# Altium PCB lessbadschematic.PcbDoc
Units mm, origin at the board's own origin, x right, y up, seen from the top; angles counter-clockwise.
Board outline 152.4 x 101.6 mm, 2 copper layers (Top Layer, Bottom Layer); 18 components, 27 nets, 114 pads, 7 vias.
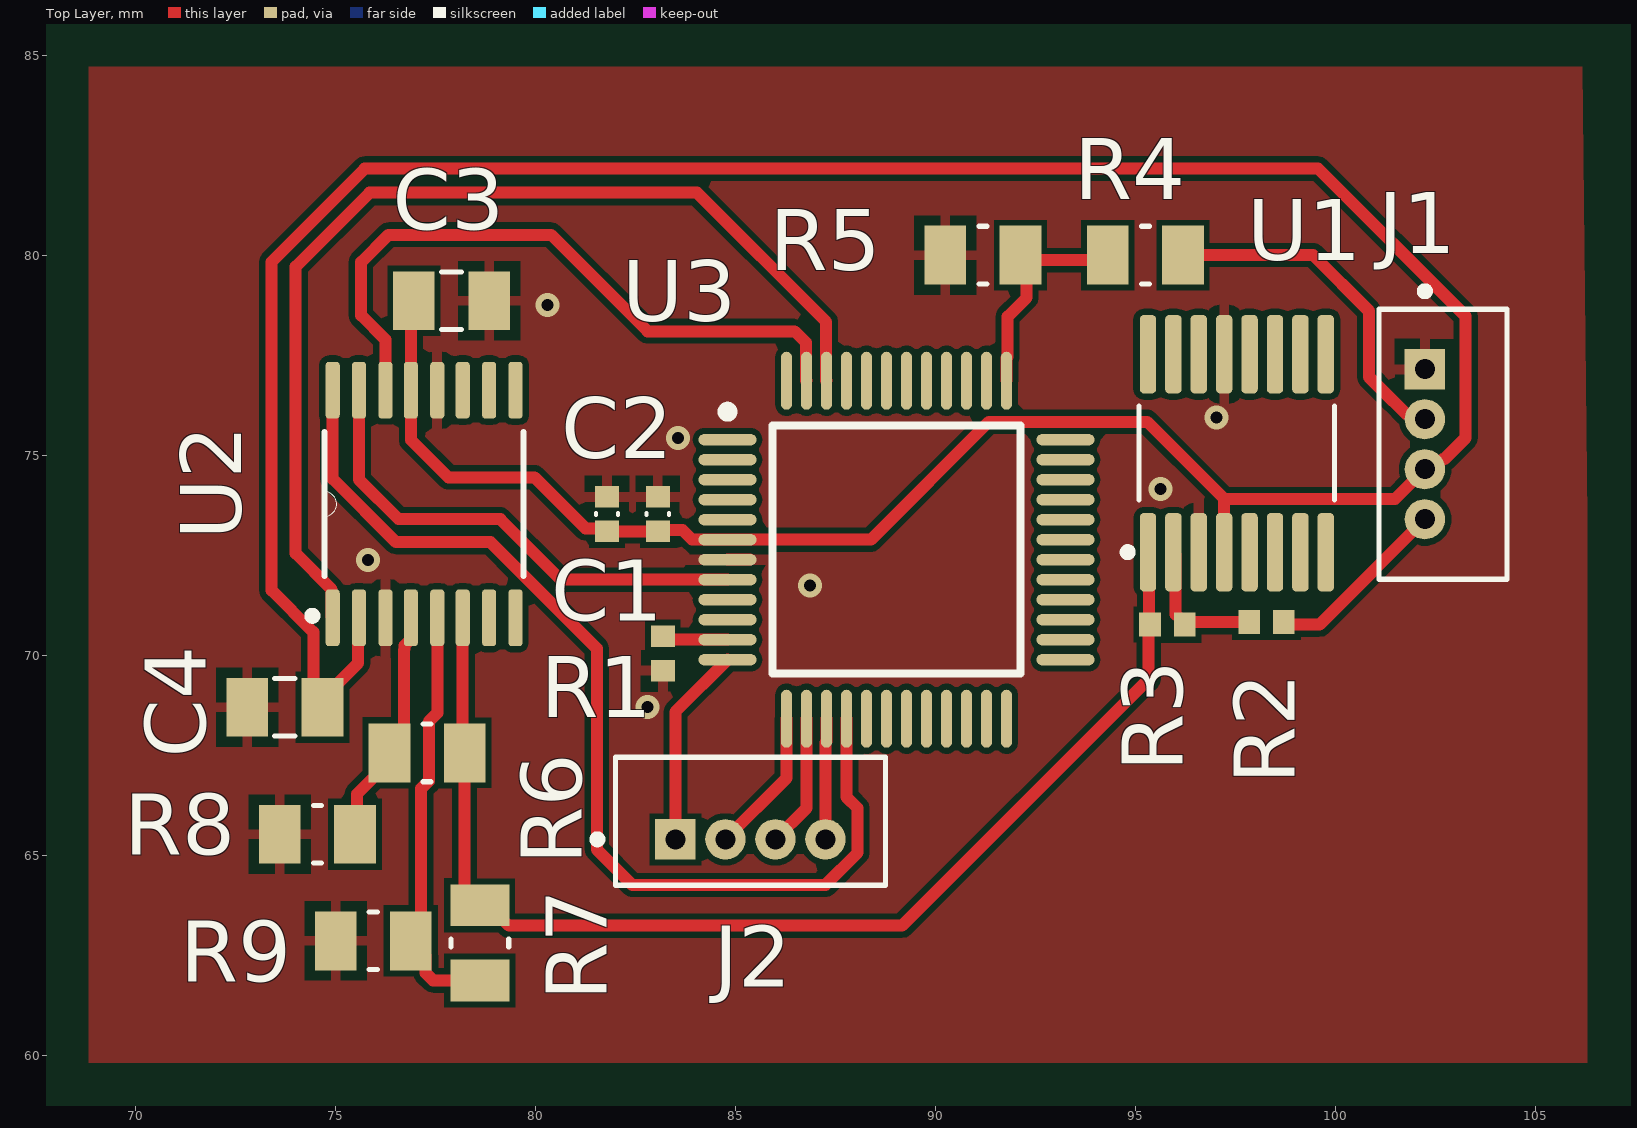
[diagram p0: Top Layer view]
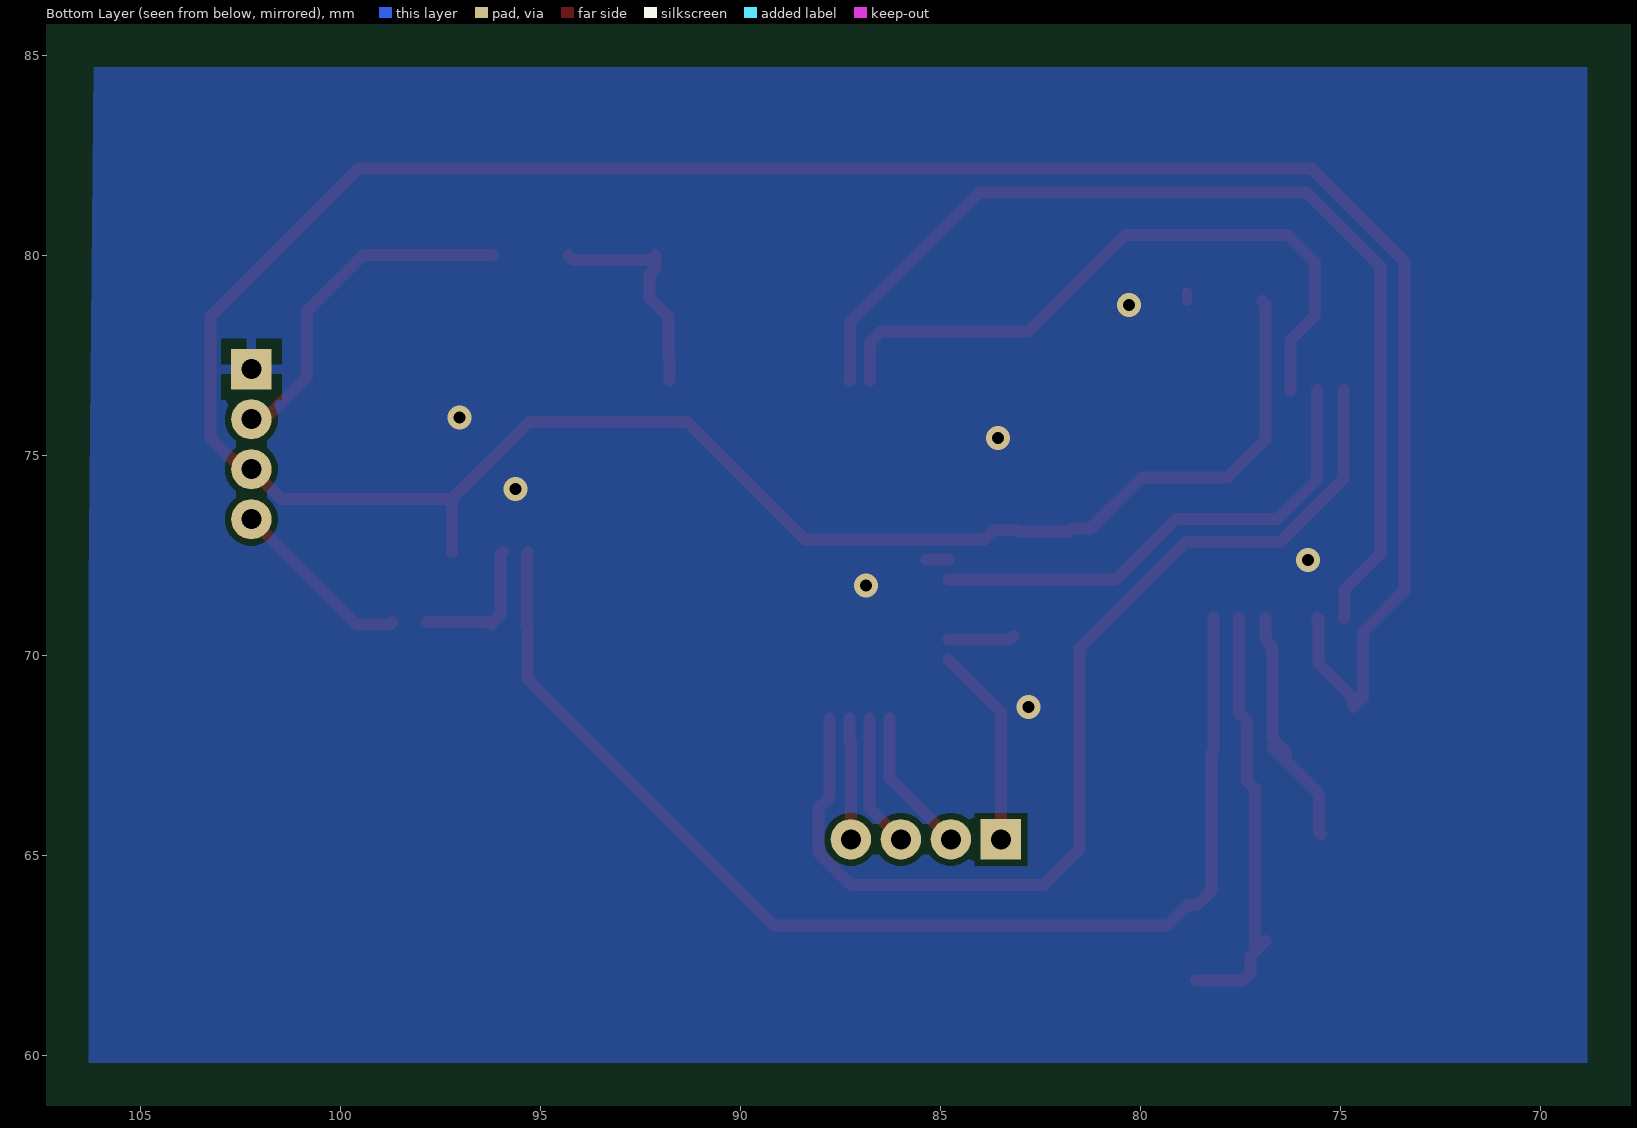
[diagram p1: Bottom Layer view, seen from below]
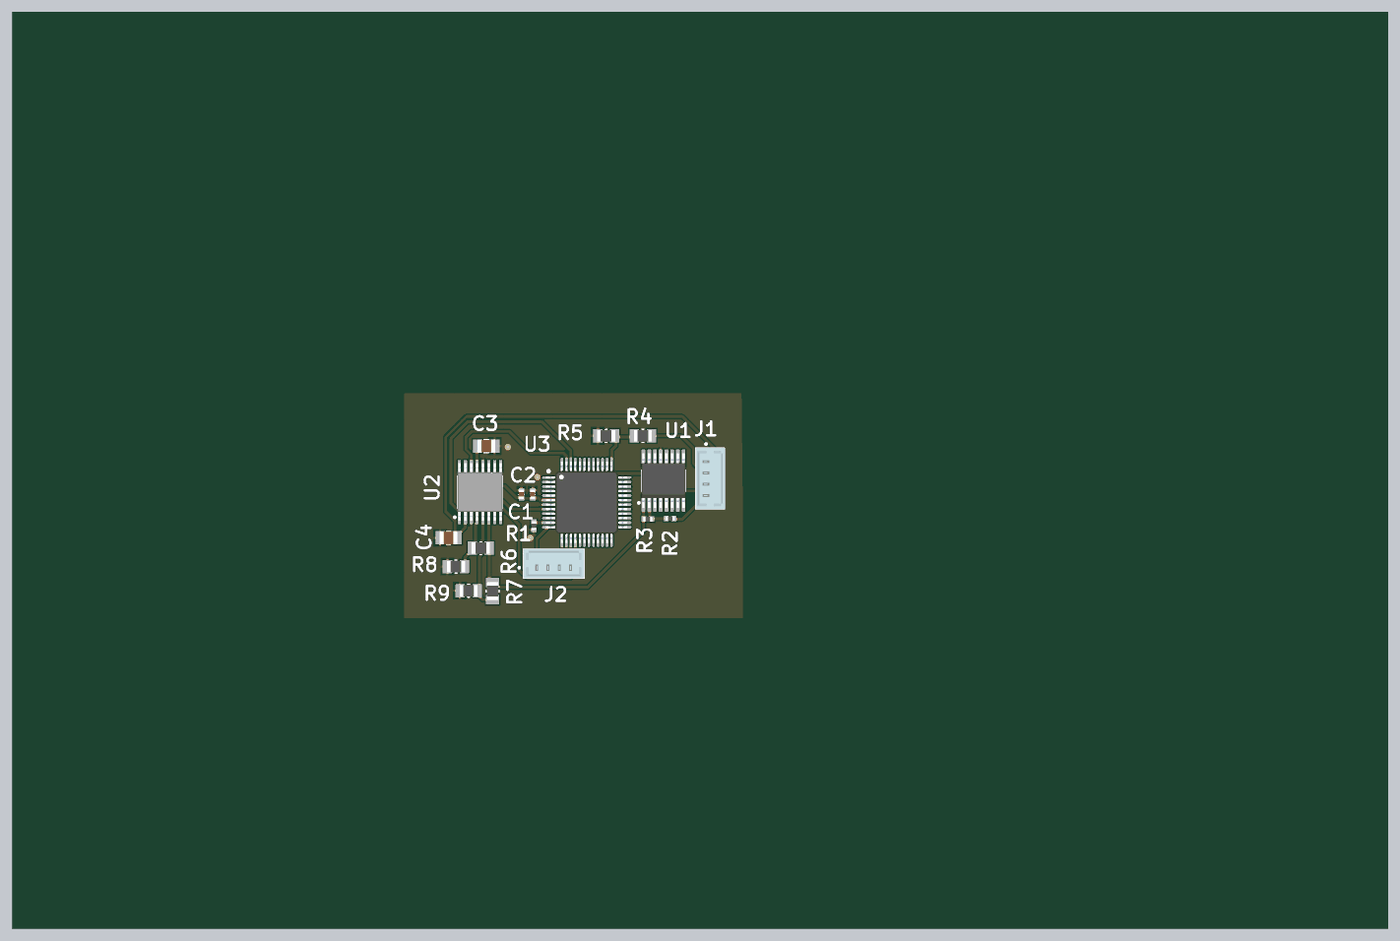
[diagram p2: 3D render of the assembled board from above, using the file's embedded part models]

## Layer stack, top to bottom
Top Solder: solder mask 0.0102, Solder Resist, Dk 3.5
Top Layer: signal copper 0.0356
Dielectric 1: dielectric 0.32, FR-4, Dk 4.8
Bottom Layer: signal copper 0.0356
Bottom Solder: solder mask 0.0102, Solder Resist, Dk 3.5

## Board outline
25.4,25.4 177.8,25.4 177.8,127 25.4,127

## Design rules (kind name [scope] priority, off if disabled: settings)
Clearance [All] p1: gap=0.152 ignorepadtopadclearanceinfootprint=FALSE
HoleSize [All] p1: absolutevalues=TRUE maxlimit=6.2 minlimit=0.3 maxpercent=80.000 minpercent=20.000
MinimumAnnularRing [All] p1: minimumring=0.15
MinimumSolderMaskSliver [All] p1: minsoldermaskwidth=0.1
PolygonConnect ViaConnect [IsVia] p1: connectstyle=Direct reliefconductorwidth=0.254 reliefentries=4 polygonreliefangle="90 Angle" airgapwidth=0.254
PolygonConnect [All] p2: connectstyle=Relief reliefconductorwidth=0.254 reliefentries=4 polygonreliefangle="90 Angle" airgapwidth=0.254
RoutingVias [All] p1: holewidth=0.3 width=0.6 viastyle="Through Hole" minholewidth=0.3 minwidth=0.5 maxholewidth=1 maxwidth=5
SilkToSilkClearance [All] p1: silktosilkclearance=0.1
SilkToSolderMaskClearance [IsPad] p1: minsilkscreentomaskgap=0.1 clearancetoexposedcopper=TRUE
SolderMaskExpansion [All] p1: expansion=0.051 istentingtop=FALSE
SupplyNets "Schematic Supply Nets_1" [InNet('GND')] p1: voltage=0.000
SupplyNets "Schematic Supply Nets" [InNet('3v3')] p2: voltage=0.000
Width [All] p1: maxlimit=25.4 minlimit=0.15 preferedwidth=0.3
26 further rules are at their usual default settings.

## Components (designator, comment, footprint, x,y, rotation, side; value= is the part's Value field where it differs from the comment)
C1 "100n" CAPACITOR_0402_1005M_55N 81.788,73.533 r270 top
C2 "10u" CAPACITOR_0402_1005M_55N 83.058,73.533 r270 top
C3 "100uF" CAPACITOR_0805_2012M-70N 77.902,78.867 r180 top
C4 "100uF" CAPACITOR_0805_2012M-70N 73.736,68.707 r180 top
J1 "0530470410" MOLEX_0530470410 102.235,77.156 r90 top
J2 "0530470410" MOLEX_0530470410 83.499,65.405 r180 top
R1 "5k" RESISTOR_0402_1005M_37N 83.185,70.053 r90 top
R2 "2k" RESISTOR_0402_1005M_37N 98.273,70.841 r180 top
R3 "3k" RESISTOR_0402_1005M_37N 95.796,70.777 r180 top
R4 "*" Resistor_0805_2012M-50N 95.25,80.01 r0 top
R5 "*" Resistor_0805_2012M-50N 91.186,80.01 r0 top
R6 "*" RESISTOR_0805_2012M-50N 77.292,67.564 r0 top
R7 "*" RESISTOR_0805_2012M-50N 78.613,62.814 r90 top
R8 "*" RESISTOR_0805_2012M-50N 74.549,65.532 r0 top
R9 "*" RESISTOR_0805_2012M-50N 75.946,62.865 r0 top
U1 "LT6222IGN#PBFA" SSOP-16N-3.9mmBody-1.75mm 97.536,75.057 r90 top
U2 "ADC128S052QCMT" TSSOP-16N_4.4mmBody-1.2mm 77.216,73.787 r90 top
U3 "MSP430FR2355TPT" LQFP_PT_48_N 89.027,72.644 r0 top

## Footprints (in the part's own frame and the unit in brackets; to place one, negate y for a bottom-side part, rotate by r counter-clockwise, add the part's x,y. Pads: shape width x height; smd on the part's side, far side on the other; paste and mask are expansions set on the pad)
CAPACITOR_0402_1005M_55N [mm] "Capacitor, 0402 (1005 metric), 0.55mm height, nominal pads"
  rect 0.54x0.6 smd mask+0.051: 1(-0.432,0) 2(0.432,0)
  silkscreen extent -0.03,-0.28 0.03,0.28, body extent -0.5,-0.28 0.5,0.27, height 0.48
CAPACITOR_0805_2012M-70N [mm] "Capacitor, 0805 (2012 metric), 0.7mm high, nominal pads,"
  rect 1.04x1.47 smd mask+0.051: 1(-0.94,0) 2(0.94,0)
  silkscreen extent -0.25,-0.72 0.25,0.72, body extent -1,-0.73 1,0.73, height 1.23
LQFP_PT_48_N [mm]
  oval 1.45x0.28 smd paste+0 mask+0.051: 1(-4.225,2.75) 2(-4.225,2.25) 3(-4.225,1.75) 4(-4.225,1.25) 5(-4.225,0.75) 6(-4.225,0.25) 7(-4.225,-0.25) 8(-4.225,-0.75) 9(-4.225,-1.25) 10(-4.225,-1.75) 11(-4.225,-2.25) 12(-4.225,-2.75) 25(4.225,-2.75) 26(4.225,-2.25) 27(4.225,-1.75) 28(4.225,-1.25) 29(4.225,-0.75) 30(4.225,-0.25) 31(4.225,0.25) 32(4.225,0.75) 33(4.225,1.25) 34(4.225,1.75) 35(4.225,2.25) 36(4.225,2.75)
  oval 0.28x1.45 smd paste+0 mask+0.051: 13(-2.75,-4.225) 14(-2.25,-4.225) 15(-1.75,-4.225) 16(-1.25,-4.225) 17(-0.75,-4.225) 18(-0.25,-4.225) 19(0.25,-4.225) 20(0.75,-4.225) 21(1.25,-4.225) 22(1.75,-4.225) 23(2.25,-4.225) 24(2.75,-4.225) 37(2.75,4.225) 38(2.25,4.225) 39(1.75,4.225) 40(1.25,4.225) 41(0.75,4.225) 42(0.25,4.225) 43(-0.25,4.225) 44(-0.75,4.225) 45(-1.25,4.225) 46(-1.75,4.225) 47(-2.25,4.225) 48(-2.75,4.225)
  silkscreen extent -4.35,-3.1 3.1,3.57, body extent -4.5,-4.5 4.5,4.5, height 1.6
MOLEX_0530470410 [mm]
  rect 1.008x1.008 hole 0.5 mask+0.051: 1(0,0)
  round 1.008 hole 0.5 mask+0.051: 2(-1.25,0) 3(-2.5,0) 4(-3.75,0)
  silkscreen extent -5.25,-2.05 2.05,1.15, body extent -5.25,-2.06 1.5,1.14, height 4.21
RESISTOR_0402_1005M_37N [mm] "Resistor, 0402 (1005 metric), 0.37mm height, nominal pads"
  rect 0.54x0.6 smd mask+0.051: 1(-0.432,0) 2(0.432,0)
  body extent -0.5,-0.25 0.5,0.25, height 0.37
Resistor_0805_2012M-50N [mm] "Resistor, 0805 (2012 metric), nominal pads"
  rect 1.04x1.47 smd mask+0.051: 1(-0.94,0) 2(0.94,0)
  silkscreen extent -0.1,-0.72 0.1,0.72, body extent -1,-0.63 1,0.62, height 0.5
RESISTOR_0805_2012M-50N [mm] "Resistor, 0805 (2012 metric), nominal pads"
  rect 1.04x1.47 smd mask+0.051: 1(-0.94,0) 2(0.94,0)
  silkscreen extent -0.1,-0.72 0.1,0.72, body extent -1,-0.63 1,0.62, height 0.5
SSOP-16N-3.9mmBody-1.75mm [mm] "SSOP, 16 pins, 3.9mm wide body, 1.75mm high"
  rrect50% 1.96x0.41 smd mask+0.051: 1(-2.475,2.222) 2(-2.475,1.587) 3(-2.475,0.952) 4(-2.475,0.317) 5(-2.475,-0.318) 6(-2.475,-0.953) 7(-2.475,-1.588) 8(-2.475,-2.222) 9(2.475,-2.222) 10(2.475,-1.587) 11(2.475,-0.952) 12(2.475,-0.317) 13(2.475,0.318) 14(2.475,0.953) 15(2.475,1.588) 16(2.475,2.222)
  silkscreen extent -2.57,-2.44 1.17,2.83, body extent -3,-2.44 3,2.44, height 1.75
TSSOP-16N_4.4mmBody-1.2mm [mil] "TSSOP, 0.65mm pitch, 4.4mm body, 1.2mm high, nominal pads"
  rrect50% 56x14 smd mask+2: 1(-112,90) 2(-112,64) 3(-112,38) 4(-112,13) 5(-112,-13) 6(-112,-38) 7(-112,-64) 8(-112,-90) 9(112,-90) 10(112,-64) 11(112,-38) 12(112,-13) 13(112,13) 14(112,38) 15(112,64) 16(112,90)
  silkscreen extent -114,-98 71,114, body extent -126,-98 126,98, height 46

## Part data
C1 C2: library part "GCM1555CxxxxxF Series", "Passive - Capacitor Series, 0402, C0G, 50V, ±1%, -55°C ~ 125°C, 0402 (1005 Metric)", Capacitance at Rated Voltage=100%, Package=0402, Rated Voltage=50V, Temp Range="-55°C ~ 125°C", Temperature Coefficient=C0G, Tolerance=±1%, Value Range="5pF ~ 1nF", E Series=E24, Supplier 1=Digikey
C3 C4: library part GRM21BR60J107ME15L, "Passive - Capacitor, 0805, 100uF Max, X5R, 6.3V ±20%, -55°C ~ 85°C, 0805 (2012 Metric). 20uF @ 6.3V", Capacitance at Rated Voltage=20%, Package=0805, Rated Voltage=6.3V, Supplier 1 Part No.=490-GRM155R61E225KE11JCT-ND, Temp Range="-55°C ~ 85°C", Temperature Coefficient=X5R, Tolerance=±20%, MF Part No.=GRM21BR60J107ME15L, Supplier 1=Digikey
J1 J2: "Header - Picoblade 04-pin, TH, STR", Supplier 1 Part No.=530470410, MF Part No.=0530470410, Mounting Type=Through-hole, Orientation=Straight, Pins=4, Pitch=1.25mm, Supplier 1=Digikey
R1 R2 R3: library part "RMCF0402JT Series", "Passive - Resistor Series, 0402, 5%, 1R - 20M, E24, 0.063W, 1/16W, ±100ppm/°C, -55°C ~ 155°C, 0402 (1005 Metric)", Package=0402, Power=1/16W, Rated Voltage=50V, Temp Range="-55°C ~ 155°C", Temperature Coefficient=±100ppm/°C, Tolerance=5%, Value Range="1 ~ 20M", E Series=E24, Supplier 1=Digikey
R4: library part "RMCF0805JT Series", "Passive - Resistor Series, 0805, 5%, 100m - 22M, E24, 0.063W, 1/16W, ±200ppm/°C, -55°C ~ 155°C, 0805 (2012 Metric)", MF Part No.=4k, Package=0805, Power=1/8W, Rated Voltage=150V, Temp Range="-55°C ~ 155°C", Temperature Coefficient=±200ppm/°C, Tolerance=5%, Value Range="100m ~ 22M", E Series=E24, Supplier 1=Digikey
R5: library part "RMCF0805JT Series", "Passive - Resistor Series, 0805, 5%, 100m - 22M, E24, 0.063W, 1/16W, ±200ppm/°C, -55°C ~ 155°C, 0805 (2012 Metric)", MF Part No.=8k, Package=0805, Power=1/8W, Rated Voltage=150V, Temp Range="-55°C ~ 155°C", Temperature Coefficient=±200ppm/°C, Tolerance=5%, Value Range="100m ~ 22M", E Series=E24, Supplier 1=Digikey
R6: library part "Generic Resistor", "Passive - Resistor, Generic", MF Part No.=10k, Tolerance=?%
R7 R8 R9: library part "Generic Resistor", "Passive - Resistor, Generic", MF Part No.=1k, Tolerance=?%
U1: library part LT6222IGN#PBF, "IC - Opamp, High Speed, 4-Channel, 60MHz GBWP, RRIO, 2.2V to 12.6V, -40 to 85, SSOP-16", Package=TSSOP-16, Rated Voltage=12.6V, Supplier 1 Part No.=LT6222IGN#PBF-ND, Temp Range="-40°C ~ 85°C", MF Part No.=LT6222IGN#PBF, Supplier 1=Digikey
U2: "IC - ADC, 8-Channel, 12-bit, SPI, Split digital/analog Vcc", MF Part No.=ADC128S052QCMT/NOPB-ND, Package=TSSOP-16, Rated Voltage=5.25V, Supplier 1 Part No.=ADC128S052CIMT/NOPB-ND, Temp Range="-40°C ~ 105°C", Supplier 1=Digikey
U3: "IC - Microcontroller, 24MHz, 32KB FRAM, Op-Amps/PGAs, 12-bit DACs, 12-bit ADC, 48-LQFP, -40 to 105C", Package=LQFP-48, Rated Voltage=3.6V, Supplier 1 Part No.=296-50260-ND, Temp Range="-40°C ~ 105°C", MF Part No.=MSP430FR2355TPT, Supplier 1=Digikey

## Via types
v1: diameter 0.6, hole 0.3, Top Layer to Bottom Layer, 7 vias

## Nets (pads, with @x,y where several pads share a name; then routed paths per layer and width w, separated by ;. In a path a pad name is that pad's centre, name@x,y a point inside that pad or via, vN(x,y) a via of type N, cw(c..) or ccw(c..) an arc to the next point about the centre after c; other vN are vias at no path point)
3v3: C1.2 C2.2 C3.2 C4.1 J1.3 U1.4 U2.2 U2.13 U3.6 | length 84.6
  Top Layer w0.3: U2.2 75.563,70.914 75.563,69.809 74.676,68.922 C4.1 74.45,68.933 74.45,70.584 73.406,71.628 73.406,79.843 75.732,82.169 99.568,82.169 103.251,78.486 103.251,75.438 102.727,74.914 102.684,74.914 102.427,74.656 J1.3 101.493,73.914 97.218,73.914 ; C3.2 76.886,78.791 76.886,75.393 77.824,74.455 79.977,74.455 81.256,73.176 81.713,73.176 C1.2 C2.2 83.091,73.134 83.681,73.134 83.911,72.904 84.792,72.904 U3.6 88.388,72.894 91.336,75.842 95.291,75.842 97.218,73.914 ; U1.4 97.218,73.914
"ADC C\S\": U2.1 U3.46 | length 26
  Top Layer w0.3: U2.1 74.902,70.97 74.902,71.656 74.004,72.554 74.004,79.719 75.854,81.569 84.039,81.569 87.267,78.341 87.267,76.879 U3.46
"ADC output": U2.15 U3.8 | length 12.5
  Top Layer w0.3: U2.15 75.59,74.397 76.581,73.406 79.121,73.406 80.633,71.894 U3.8
ADCA: R6.1 R8.2 U2.4 | length 6.3
  Top Layer w0.3: R8.2 75.544,65.587 75.544,66.541 R6.1@76.708,67.705 ; R6.1 76.708,67.92 76.708,70.135 76.731,70.158 76.731,70.254 76.886,70.409 U2.4
ADCB: R7.1 R9.2 U2.5 | length 10.9
  Top Layer w0.3: R9.2 R9.2@77.14,62.611 ; U2.5 77.546,68.561 77.338,68.353 77.338,66.868 77.14,66.669 R9.2@77.14,62.611 ; R7.1 77.445,61.874 77.256,62.063 77.256,62.495 R9.2@77.14,62.611
"Amplified signal": R3.2 R6.2 R7.2 U1.1 U2.6 | length 30.3
  Top Layer w0.3: U2.6 78.181,67.615 R6.2 ; R7.2@78.608,63.759 78.822,63.759 79.336,63.246 89.165,63.246 95.326,69.407 95.326,70.739 R3.2 95.339,70.802 95.339,72.557 U1.1 ; R7.2 78.602,63.754 78.232,64.124 R6.2@78.232,67.349 ; R6.2@78.232,67.349 R6.2 ; R6.2@78.232,67.349 R6.2
CLK: U2.16 U3.16 | length 26.3
  Top Layer w0.3: U2.16 74.93,74.417 76.511,72.836 78.873,72.836 81.534,70.175 81.534,65.151 82.423,64.262 87.246,64.262 88.055,65.071 88.055,66.181 87.777,66.46 U3.16
"Current reading": J1.2 R4.2 | length 8.7
  Top Layer w0.3: R4.2 99.441,80.01 100.838,78.613 100.838,76.962 101.45,76.35 101.457,76.35 101.765,76.041 102.1,76.041 J1.2
Din: U2.14 U3.47 | length 16.9
  Top Layer w0.3: U2.14 76.251,77.896 75.642,78.504 75.642,79.833 76.327,80.518 80.391,80.518 82.804,78.105 86.482,78.105 86.767,77.82 86.767,76.879 U3.47
GND: C1.1 C2.1 C3.1 C4.2 J1.1 R1.1 R5.1 R8.1 R9.1 U1.3 U1.13 U2.3 U2.12 U3.7 | length 0.8
  Top Layer w0.254: C3.1 C3.1@78.842,79.082
  Top Layer w0.3: U3.7 U3.7@85.367,72.394
  other v1: 82.804,68.707 86.868,71.755 75.819,72.39 95.631,74.168 83.566,75.438 97.028,75.946 80.298,78.764
GPIO1: J2.3 U3.14 | length 3.3
  Top Layer w0.3: J2.3 86.777,66.183 U3.14
GPIO2: J2.4 U3.15 | length 3
  Top Layer w0.3: J2.4 87.249,67.826 87.277,67.854 U3.15
NetJ?_1: 
NetJ?_2: 
NetJ?_3: 
NetJ?_4: 
NetR1_2: R1.2 U3.11 | length 1.7
  Top Layer w0.3: R1.2 83.276,70.394 U3.11
NetR2_2: R2.2 R3.1 U1.2 | length 3.6
  Top Layer w0.3: U1.2 96.004,72.527 96.004,71.497 96.007,71.494 96.007,71.028 96.228,70.807 R3.1 96.292,70.841 R2.2
NetR4_1: R4.1 R5.2 U3.37 | length 5.7
  Top Layer w0.3: U3.37 91.777,77.434 91.805,77.462 91.805,78.47 92.28,78.945 92.28,79.529 92.126,79.684 92.126,79.883 R5.2 92.253,79.883 92.444,79.883 94.183,79.883 R4.1
NetR?_1: 
NetRa_2: 
NetRs_1: 
NetU?_14: 
NetU?_16: 
SCL: J2.1 U3.12 | length 5
  Top Layer w0.3: J2.1 83.499,68.591 U3.12
SDA: J2.2 U3.13 | length 3.6
  Top Layer w0.3: J2.2 86.277,66.933 U3.13
"Voltage reading": J1.4 R2.1 | length 4.7
  Top Layer w0.3: R2.1 98.775,70.771 99.6,70.771 J1.4
pads on no net: U1.5 U1.6 U1.7 U1.8 U1.9 U1.10 U1.11 U1.12 U1.14 U1.15 U1.16 U2.7 U2.8 U2.9 U2.10 U2.11 U3.1 U3.2 U3.3 U3.4 U3.5 U3.9 U3.10 U3.17 U3.18 U3.19 U3.20 U3.21 U3.22 U3.23 U3.24 U3.25 U3.26 U3.27 U3.28 U3.29 U3.30 U3.31 U3.32 U3.33 U3.34 U3.35 U3.36 U3.38 U3.39 U3.40 U3.41 U3.42 U3.43 U3.44 U3.45 U3.48

## Polygon pours and split planes (outlines as drawn)
GND on Bottom Layer "GND_L02_P000" (solid, remove dead copper, pour order 0): 68.834,84.709 68.834,59.817 106.299,59.817 106.299,71.755 106.172,84.709
GND on Top Layer "GND_L01_P001" (solid, remove dead copper, pour order 1): 68.834,84.717 68.834,59.817 106.299,59.817 106.299,73.406 106.172,84.717